# EAGLE board 5_TTY_Front (EAGLE 7.7.0)
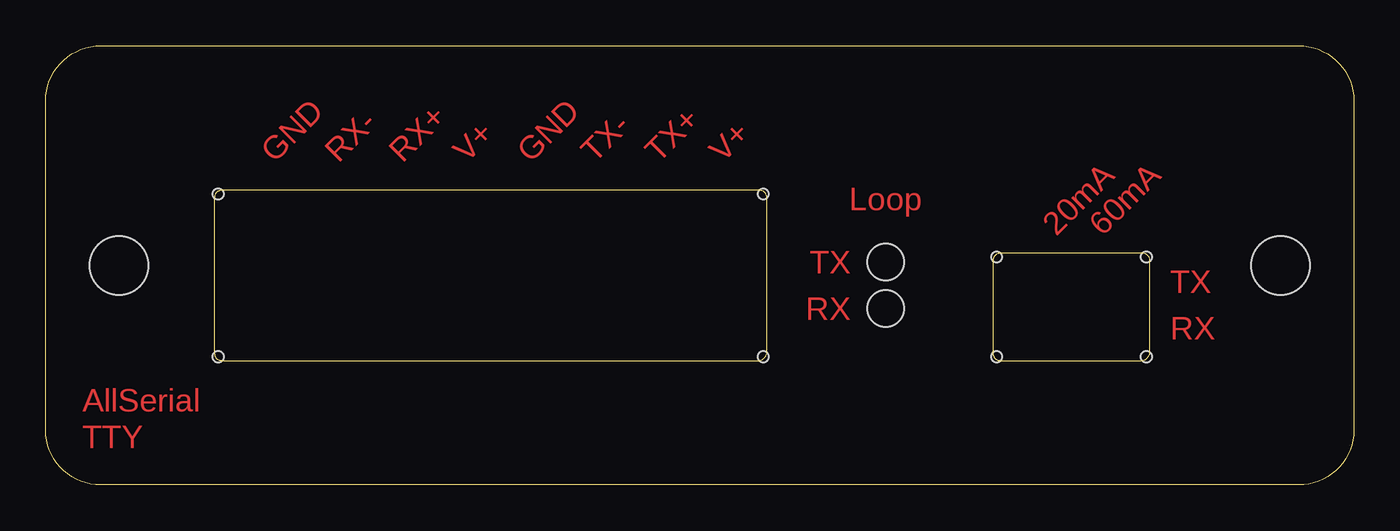
[diagram p0: board, top side]
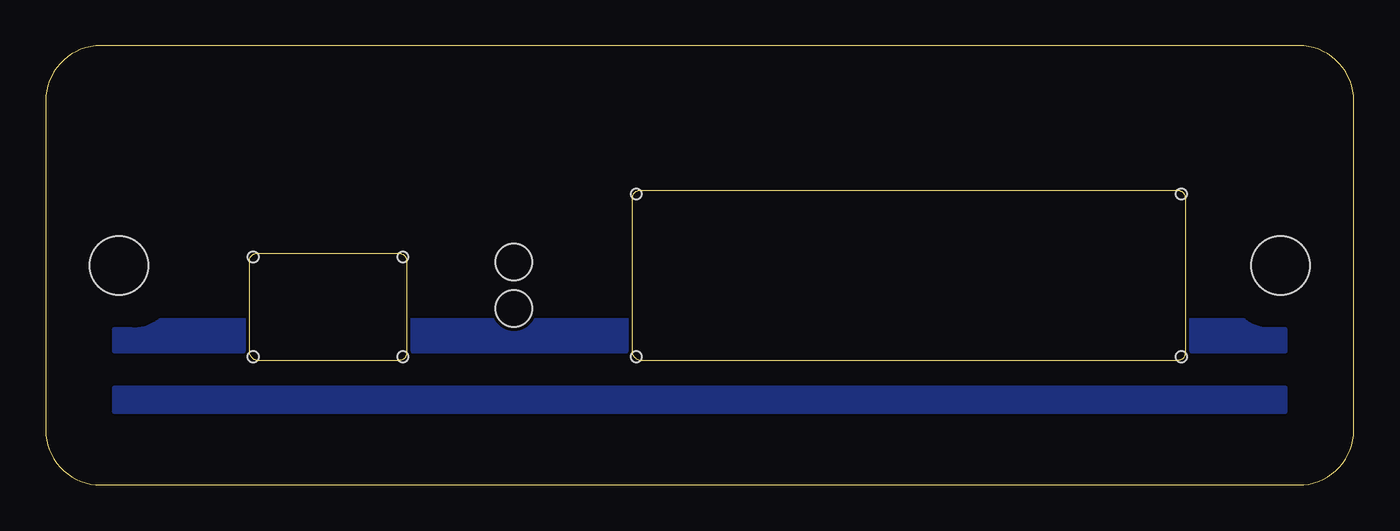
[diagram p1: board, bottom side, seen from below]

Size 71.5 x 24 mm. Coordinates in mm from the lower left corner, seen from the top.
Copper layers (1*16): Top 0.035mm / dielectric 1.5mm / Bottom 0.035mm
Design rules "default *": minimum track width 10mil, minimum drill 24mil, track to track 8mil, track to pad 8mil, pad to pad 8mil, via to via 8mil, smd to smd 8mil, copper to edge 0.2mm, drill to drill 8mil, minimum pad ring 10mil, minimum via ring 8mil, stop-mask expansion 4mil, vias tented up to drill 0mil, thermal gap 10mil
Holes 2 mm at 45.91,9.64 45.91,12.18

## Footprints (pad centres in the part's own frame; a part is rotated, then mirrored left to right if it is on the bottom)
PANEL = hole 3.2: -31.75,12; 31.75,12
RIA_AKL182-08 = hole 0.6: -14.9,15.9; -14.9,7; 14.9,15.9; 14.9,7
LSTB-03-2 = hole 0.6: -4.09,12.46; -4.09,7; 4.09,12.46; 4.09,7

## Placement (x,y rotation side)
E$1  [PANEL]  35.75,0 0 top
E$2  [RIA_AKL182-08]  24.32,0 0 top
E$3  [LSTB-03-2]  56.07,0 0 top

## Library data of the parts
E$1-E$3 = AllSerialv2

## Tracks (layer width: path | path; a pad name or v marks a point on that pad's centre or on a via)
S$1
  pour Bottom: 3.75,8.5 3.75,7.3 67.75,7.3 67.75,8.5 66.8,8.5 arc-45 65.26,8.99 64.75,9 6,9 arc-45 4.54,8.5
S$2
  pour Bottom: 3.75,4 3.75,5.3 67.75,5.3 67.75,4

## Text on the board
Top: GND | RX- | RX+ | V+ | GND | TX- | TX+ | V+ | Loop | 20mA | 60mA | TX | TX | RX | RX | TTY
tStop: GND | RX- | RX+ | V+ | GND | TX- | TX+ | V+ | Loop | 20mA | 60mA | TX | TX | RX | RX | TTY
bStop: AllSerial current loop - v1.2 46/18